# Altium PCB slave.PcbDoc
Units mil, origin at the board's own origin, x right, y up, seen from the top; angles counter-clockwise.
Board outline 6000 x 4000 mil, 2 copper layers (Top Layer, Bottom Layer); 84 components, 83 nets, 378 pads, 46 vias.
Unrouted connection lines stored in the file: 1.
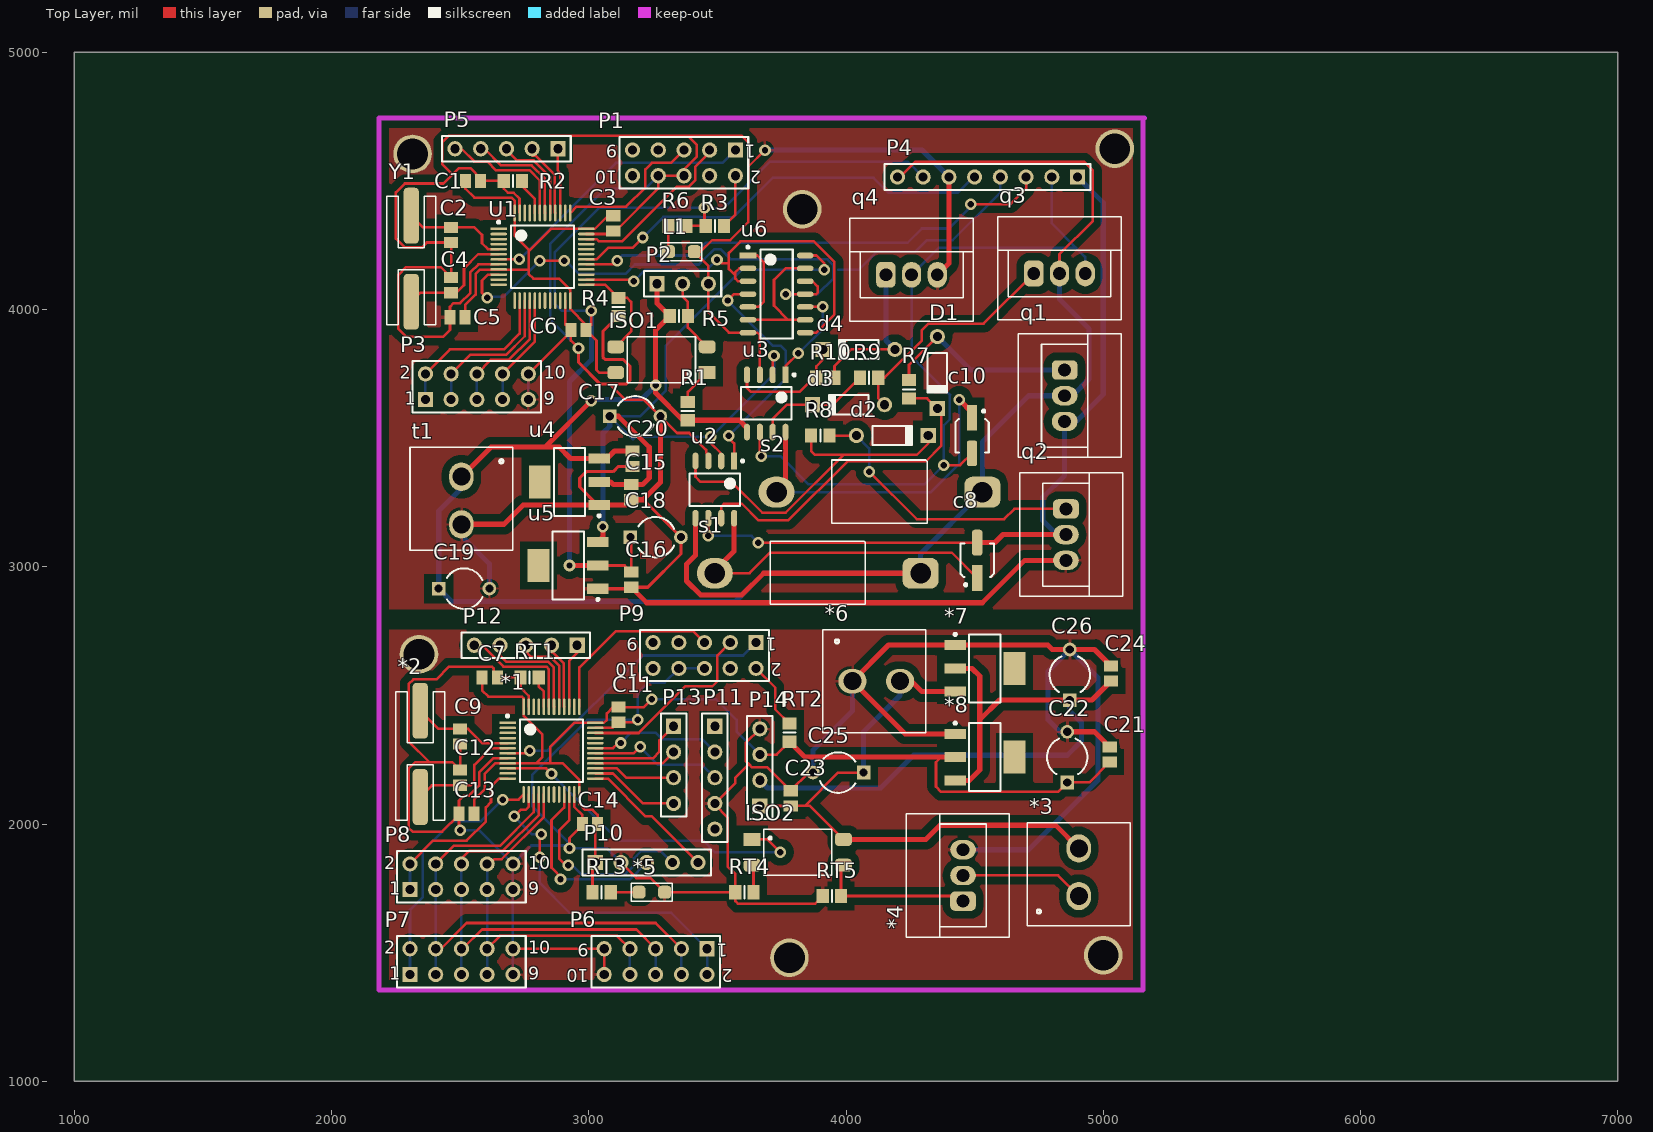
[diagram p0: Top Layer view]
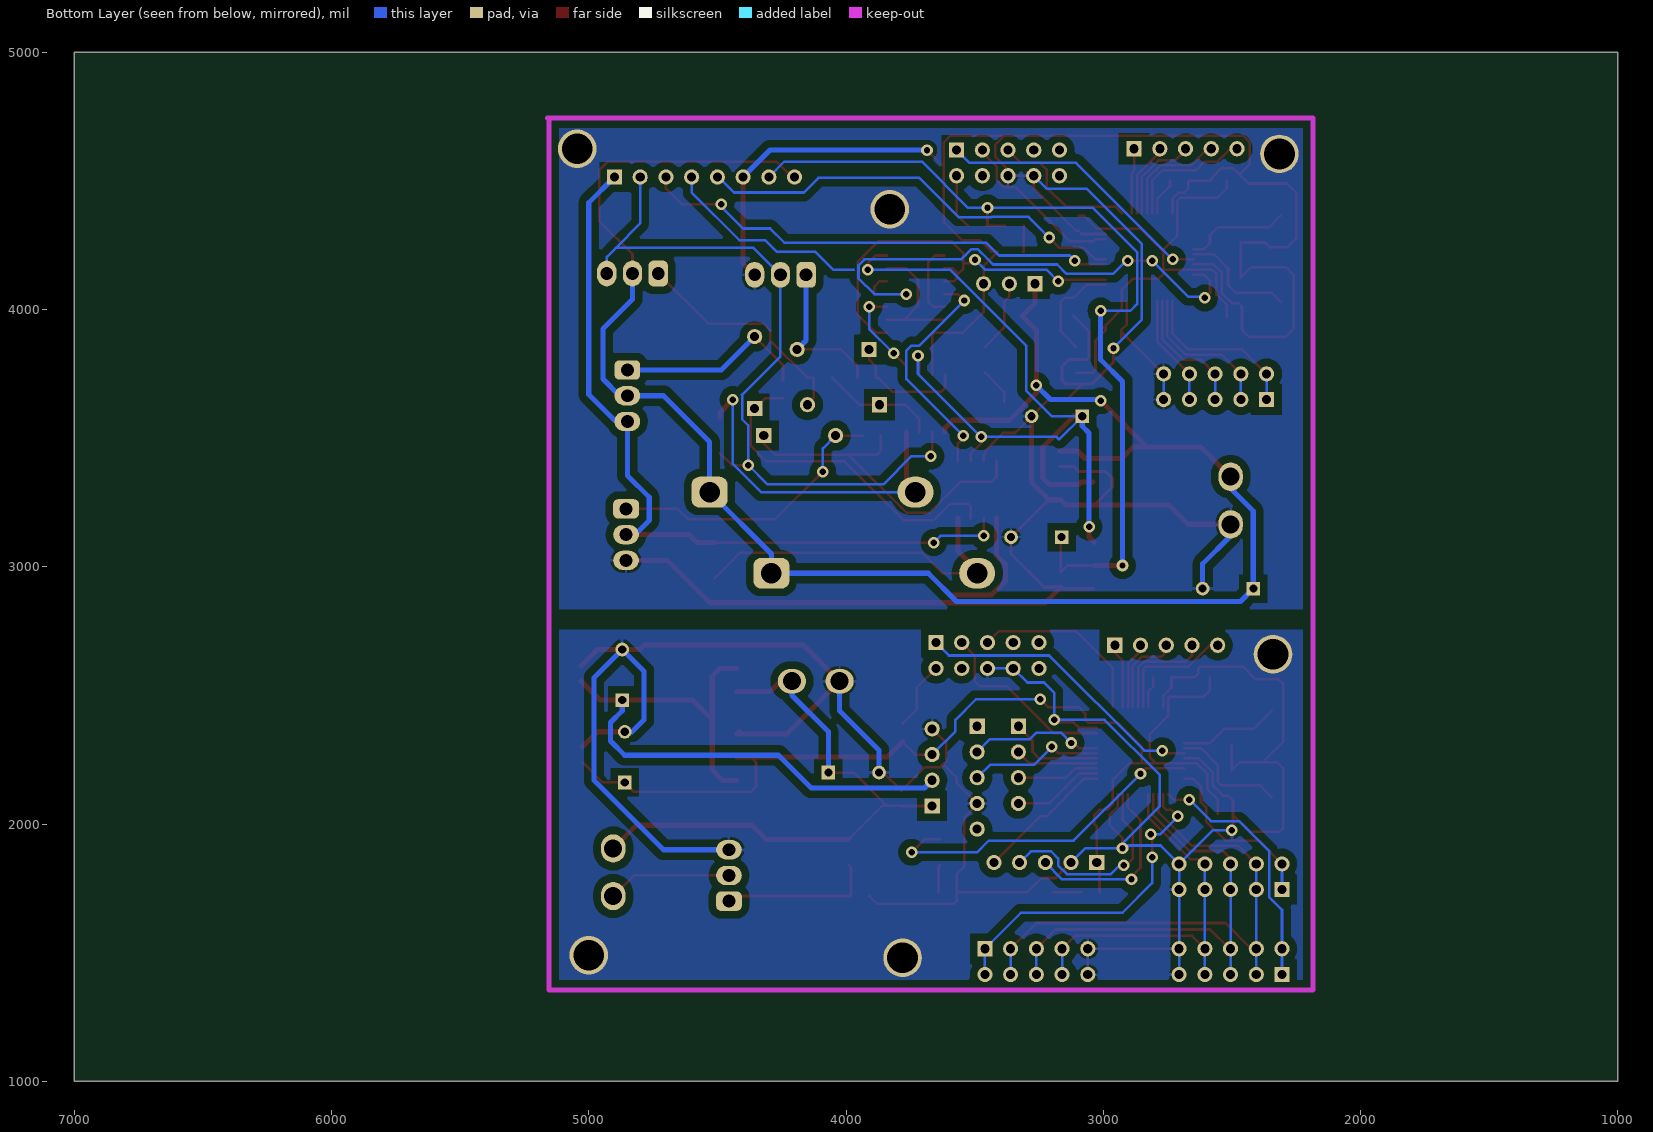
[diagram p1: Bottom Layer view, seen from below]

## Layer stack, top to bottom
Top Solder: solder mask 0.4, Solder Resist, Dk 3.5
Top Layer: signal copper 1.4
Dielectric 1: dielectric 12.6, FR-4, Dk 4.8
Bottom Layer: signal copper 1.4
Bottom Solder: solder mask 0.4, Solder Resist, Dk 3.5

## Board outline
1000,1000 7000,1000 7000,5000 1000,5000

## Design rules (kind name [scope] priority, off if disabled: settings)
Clearance "PolyGon Pour Clearance" [InPolyGon] p1: gap=30
Clearance [All] p2: gap=9
Height [All] p1 off: minheight=0 maxheight=1000 prefheight=500
PolygonConnect [All] p1: connectstyle=Relief reliefconductorwidth=10 reliefentries=4 polygonreliefangle="90 Angle" airgapwidth=10
RoutingVias [All] p1: holewidth=20 width=40 viastyle="Through Hole" minholewidth=20 minwidth=40 maxholewidth=25 maxwidth=45
SolderMaskExpansion [All] p1: expansion=4
UnpouredPolygon [All] p1: allowunpoured=FALSE
Width [All] p1: maxlimit=25 minlimit=10 preferedwidth=12 minimp=50.000000 maximp=50.000000 favimp=50.000000
28 further rules are at their usual default settings.

## Components (designator, comment, footprint, x,y, rotation, side; value= is the part's Value field where it differs from the comment)
*1 "stm32f103c8t6" LQFP48_stm32 2855,2285 r0 top
*2 "XTAL" xtal_smd 2345,2440 r270 top
*3 "domino2" Domino_2 4905,1730 r90 top
*4 "IRF540N" TO220 4455,1800 r90 top
*5 "led_smd" led_smd 3245,1735 r0 top
*6 "domino2" Domino_2 4035,2555 r0 top
*7 "ASM1117-5" SOT223 4540,2605 r0 top
*8 "ASM1117-5" SOT223 4540,2260 r0 top
C1 "Cap Pol3" C0805 2550,4500 r0 top
C2 "Cap Pol3" C0805 2465,4290 r270 top
C3 "Cap Pol3" C0805 3095,4335 r270 top
C4 "Cap Pol3" C0805 2465,4095 r90 top
C5 "Cap Pol3" C0805 2490,3970 r180 top
C6 "Cap Pol3" C0805 2960,3920 r180 top
C7 "Cap Pol3" C0805 2615,2570 r0 top
c8 "CAP_ALU_A" cap_alu_a 4510,3025 r90 top
C9 "Cap Pol3" C0805 2500,2340 r270 top
c10 "CAP_ALU_A" cap_alu_a 4490,3510 r270 top
C11 "Cap Pol3" C0805 3115,2425 r270 top
C12 "Cap Pol3" C0805 2500,2180 r90 top
C13 "Cap Pol3" C0805 2525,2040 r180 top
C14 "Cap Pol3" C0805 3005,2000 r180 top
C15 "Cap Pol3" C0805 3165,3290 r270 top
C16 "Cap Pol3" C0805 3165,2950 r270 top
C17 "Cap2" CAPR5-4X5 3180,3585 r0 top
C18 "Cap2" CAPR5-4X5 3260,3115 r0 top
C19 "Cap2" CAPR5-4X5 2515,2915 r0 top
C20 "Cap Pol3" C0805 3170,3420 r270 top
C21 "Cap Pol3" C0805 5025,2270 r90 top
C22 "Cap2" CAPR5-4X5 4860,2260 r90 top
C23 "Cap Pol3" C0805 3785,2100 r90 top
C24 "Cap Pol3" C0805 5030,2585 r90 top
C25 "Cap2" CAPR5-4X5 3970,2200 r180 top
C26 "Cap2" CAPR5-4X5 4870,2580 r90 top
D1 "Diode 1N4148" DO-35 4355,3755 r270 top
d2 "Diode 1N4148" DO-35 4180,3510 r0 top
d3 "Diode 1N4148" DO-35 4010,3630 r180 top
d4 "Diode 1N4148" DO-35 4050,3845 r180 top
ISO1 "opto" opto_smd 3460,3755 r180 top
ISO2 "opto" opto_smd 3635,1940 r0 top
L1 "led_smd" led_smd 3360,4225 r0 top
P1 "Header 5X2" HDR2X5 3570,4620 r180 top
P2 "Header 3" HDR1X3 3265,4100 r0 top
P3 "Header 5X2" HDR2X5 2365,3650 r0 top
P4 "Header 8" HDR1X8 4900,4515 r180 top
P5 "Header 5" HDR1X5 2880,4625 r180 top
P6 "Header 5X2" HDR2X5 3460,1515 r180 top
P7 "Header 5X2" HDR2X5 2305,1415 r0 top
P8 "Header 5X2" HDR2X5 2305,1745 r0 top
P9 "Header 5X2" HDR2X5 3650,2705 r180 top
P10 "Header 5" HDR1X5 3025,1850 r0 top
P11 "Header 5" HDR1X5 3490,2380 r270 top
P12 "Header 5" HDR1X5 2955,2695 r180 top
P13 "Header 4" HDR1X4 3330,2380 r270 top
P14 "Header 4" HDR1X4 3665,2070 r90 top
q1 "IRF540N" TO220 4850,3665 r270 top
q2 "IRF540N" TO220 4855,3125 r270 top
q3 "IRF540N" TO220 4830,4140 r0 top
q4 "IRF540N" TO220 4255,4135 r0 top
R1 "" 6-0805_N 3385,3605 r90 top
R2 "" 6-0805_N 2705,4500 r180 top
R3 "" 6-0805_N 3490,4325 r0 top
R4 "" 6-0805_N 3115,4010 r90 top
R5 "" 6-0805_N 3350,3975 r180 top
R6 "" 6-0805_N 3345,4325 r0 top
R7 "" 6-0805_N 4245,3690 r270 top
R8 "" 6-0805_N 3900,3510 r180 top
R9 "" 6-0805_N 4090,3735 r180 top
R10 "" 6-0805_N 3920,3735 r180 top
RT1 "Res Thermal" 6-0805_N 2770,2570 r0 top
RT2 "Res Thermal" 6-0805_N 3780,2355 r270 top
RT3 "Res Thermal" 6-0805_N 3050,1735 r180 top
RT4 "Res Thermal" 6-0805_N 3605,1735 r180 top
RT5 "Res Thermal" 6-0805_N 3945,1720 r180 top
s1 "IN5822" "schottky diode" 3890,2975 r180 top
s2 "IN5822" "schottky diode" 4130,3290 r180 top
t1 "domino2" Domino_2 2505,3340 r270 top
U1 "stm32f103c8t6" LQFP48_stm32 2820,4205 r0 top
u2 "ir2184" SOP8_ir2184 3490,3300 r270 top
u3 "ir2184" SOP8_ir2184 3690,3635 r270 top
u4 "ASM1117-5" SOT223 2925,3330 r180 top
u5 "ASM1117-3.3" SOT223 2920,3005 r180 top
u6 "74HC02D" "SOP14_Nor gate" 3730,4060 r0 top
Y1 "XTAL" xtal_smd 2310,4365 r270 top

## Footprints (in the part's own frame and the unit in brackets; to place one, negate y for a bottom-side part, rotate by r counter-clockwise, add the part's x,y. Pads: shape width x height; smd on the part's side, far side on the other; paste and mask are expansions set on the pad)
6-0805_N [mm] "Chip Resistor, Body 2.0x1.2mm, IPC Medium Density"
  rect 1.2x1.4 smd: 1(-0.9,0) 2(0.9,0)
  silkscreen extent 0,-0.6 0,0.6, body extent -1.07,-0.7 1.07,0.7, height 0.7
C0805 [mm] "Chip Capacitor, Body 2.0x1.3mm, IPC High Density"
  rect 1.1x1.4 smd: 1(-0.75,0) 2(0.75,0)
  body extent -1.1,-0.72 1.1,0.72, height 1.4
cap_alu_a [mil] "Aluminum Electrolytic Capacitor, Body 3.30x3.30x29.00mm, IPC Low Density"
  rect 100x40 smd: 1(-68.9,0)
  rrect50% 100x40 smd: 2(68.9,0)
  silkscreen extent -100,-65 65,65, body extent -65,-65 65,65, height 1142
CAPR5-4X5 [mm] "Capacitor; 2 Leads"
  rect 1.35x1.35 hole 0.8: 1(-2.5,0)
  round 1.35 hole 0.8: 2(2.5,0)
  silkscreen extent -1.69,-2 1.82,2
DO-35 [mm] "Diode, Axial; Body 3.8 x 1.9 mm (LxDia. max), Lead Dia. 0.53 mm (max)"
  round 1.5 hole 0.9: 1(-3.55,0)
  rect 1.5x1.5 hole 0.9: 2(3.55,0)
  silkscreen extent -1.95,-0.95 2.05,0.95
Domino_2 [mil]
  oval 110x95 hole 70: 1(-10,0) 2(175,0)
  silkscreen extent -125,-200 275,200
HDR1X3 [mm] "Connector; Header; 3 Position"
  rect 1.5x1.5 hole 0.9: 1(0,0)
  round 1.5 hole 0.9: 2(2.54,0) 3(5.08,0)
  silkscreen extent -1.27,-1.27 6.35,1.27
HDR1X4 [mm] "Connector; Header; 4 Position"
  rect 1.5x1.5 hole 0.9: 1(0,0)
  round 1.5 hole 0.9: 2(2.54,0) 3(5.08,0) 4(7.62,0)
  silkscreen extent -1.27,-1.27 8.89,1.27
HDR1X5 [mm] "Connector; Header; 5 Position"
  rect 1.5x1.5 hole 0.9: 1(0,0)
  round 1.5 hole 0.9: 2(2.54,0) 3(5.08,0) 4(7.62,0) 5(10.16,0)
  silkscreen extent -1.27,-1.27 11.43,1.27
HDR1X8 [mm] "Connector; Header; 8 Position"
  rect 1.5x1.5 hole 0.9: 1(0,0)
  round 1.5 hole 0.9: 2(2.54,0) 3(5.08,0) 4(7.62,0) 5(10.16,0) 6(12.7,0) 7(15.24,0) 8(17.78,0)
  silkscreen extent -1.27,-1.27 19.05,1.27
HDR2X5 [mm] "Connector; Header; 5x2 Position"
  rect 1.5x1.5 hole 0.9: 1(0,0)
  round 1.5 hole 0.9: 2(0,2.54) 3(2.54,0) 4(2.54,2.54) 5(5.08,0) 6(5.08,2.54) 7(7.62,0) 8(7.62,2.54) 9(10.16,0) 10(10.16,2.54)
  silkscreen extent -1.27,-1.27 11.43,3.81
led_smd [mil]
  rrect50% 50x50 smd: 1(-50,0) 2(50,0)
  silkscreen extent -80,-35 80,35
LQFP48_stm32 [mm] "TSQFP, 48-Leads, Body 7.00x7.00mm, Pitch 0.50mm, IPC High Density"
  rect 1.65x0.25 smd: 1(-4.325,2.75)
  oval 1.65x0.25 smd: 2(-4.325,2.25) 3(-4.325,1.75) 4(-4.325,1.25) 5(-4.325,0.75) 6(-4.325,0.25) 7(-4.325,-0.25) 8(-4.325,-0.75) 9(-4.325,-1.25) 10(-4.325,-1.75) 11(-4.325,-2.25) 12(-4.325,-2.75) 25(4.325,-2.75) 26(4.325,-2.25) 27(4.325,-1.75) 28(4.325,-1.25) 29(4.325,-0.75) 30(4.325,-0.25) 31(4.325,0.25) 32(4.325,0.75) 33(4.325,1.25) 34(4.325,1.75) 35(4.325,2.25) 36(4.325,2.75)
  oval 0.25x1.65 smd: 13(-2.75,-4.325) 14(-2.25,-4.325) 15(-1.75,-4.325) 16(-1.25,-4.325) 17(-0.75,-4.325) 18(-0.25,-4.325) 19(0.25,-4.325) 20(0.75,-4.325) 21(1.25,-4.325) 22(1.75,-4.325) 23(2.25,-4.325) 24(2.75,-4.325) 37(2.75,4.325) 38(2.25,4.325) 39(1.75,4.325) 40(1.25,4.325) 41(0.75,4.325) 42(0.25,4.325) 43(-0.25,4.325) 44(-0.75,4.325) 45(-1.25,4.325) 46(-1.75,4.325) 47(-2.25,4.325) 48(-2.75,4.325)
  silkscreen extent -4.45,-3.1 3.1,3.55, body extent -3.5,-3.5 3.5,3.5, height 1.6
opto_smd [mil]
  rect 65x50 smd: 1(0,0)
  rrect50% 65x50 smd: 2(0,-100) 3(355,-100) 4(355,0)
  silkscreen extent 45,-140 310,40
"schottky diode" [mil]
  rrect50% 140x120 hole 80: 1(-400,0)
  oval 140x120 hole 80: 2(400,0)
  silkscreen extent -185,-125 185,120
SOP8_ir2184 [mm]
  rect 1.65x0.6 smd: 1(-2.825,1.905)
  oval 1.65x0.6 smd: 2(-2.825,0.635) 3(-2.825,-0.635) 4(-2.825,-1.905) 5(2.825,-1.905) 6(2.825,-0.635) 7(2.825,0.635) 8(2.825,1.905)
  silkscreen extent -2.95,-2.5 1.6,2.88, body extent -2,-2.5 2,2.5, height 1.75
"SOP14_Nor gate" [mm] "SOIC, 14-Leads, Body 8.65x3.90mm, Pitch 1.27mm, IPC High Density"
  rect 1.65x0.55 smd: 1(-2.825,3.81)
  oval 1.65x0.55 smd: 2(-2.825,2.54) 3(-2.825,1.27) 4(-2.825,0) 5(-2.825,-1.27) 6(-2.825,-2.54) 7(-2.825,-3.81) 8(2.825,-3.81) 9(2.825,-2.54) 10(2.825,-1.27) 11(2.825,0) 12(2.825,1.27) 13(2.825,2.54) 14(2.825,3.81)
  silkscreen extent -2.95,-4.4 1.6,4.76, body extent -2,-4.4 2,4.4, height 1.75
SOT223 [mm] "SOT223, 4-Leads, Body 6.50x7.00mm (avg), Pitch 2.30mm, IPC Medium Density"
  rect 2.15x1 smd: 1(-2.93,2.3) 2(-2.93,0) 3(-2.93,-2.3)
  rect 2.15x3.25 smd: 4(2.93,0)
  silkscreen extent -3.05,-3.35 1.55,3.47, body extent -1.86,-3.35 1.86,3.35, height 1.8
TO220 [mil]
  rrect50% 75x100 hole 50: 1(-100,0)
  oval 75x100 hole 50: 2(0,0) 3(100,0)
  silkscreen extent -240,-180 240,220
xtal_smd [mil]
  rrect50% 217x59 smd: 1(0,0) 2(335,0)
  silkscreen extent -75,-95 425,95

## Part data
C1 C2 C3 C4 C5 C6 C7 C9 C11 C12 C13 C14 C15 C16 C20 C21 C23 C24: "Polarized Capacitor (Surface Mount)"
C17 C18 C19 C22 C25 C26: "Capacitor"
D1 d2 d3 d4: "High Conductance Fast Diode"
P1 P3 P6 P7 P8 P9: "Header, 5-Pin, Dual row"
P2: "Header, 3-Pin"
P4: "Header, 8-Pin"
P5 P10 P11 P12: "Header, 5-Pin"
P13 P14: "Header, 4-Pin"
R1 R2 R3 R4 R5 R6 R7 R8 R9 R10: library part "Res Thermal", "Thermistor"
RT1 RT2 RT3 RT4 RT5: "Thermistor"
u5: library part ASM1117-5

## Free pads (board coordinates)
  round 150 hole 120: 0(2340,2660) 1(5000,1490) 2(3780,1480) 3(2315,4605) 4(5045,4625) 5(3830,4390)

## Via types
v1: diameter 45, hole 25, Top Layer to Bottom Layer, 46 vias

## Nets (pads, with @x,y where several pads share a name; then routed paths per layer and width w, separated by ;. In a path a pad name is that pad's centre, name@x,y a point inside that pad or via, vN(x,y) a via of type N, cw(c..) or ccw(c..) an arc to the next point about the centre after c; other vN are vias at no path point)
1PA0: *1.10 ISO2.1 | length 1326.1
  Top Layer w10: *1.10 2833.9,2216.1 v1(2855,2195) ; ISO2.1 3695,1940 v1(3745,1890)
  Bottom Layer w10: v1(2855,2195) 3115,1935 3445,1935 3490,1890 v1(3745,1890)
1PA2: *1.12 P8.1 P8.2 | length 684.5
  Top Layer w10: P8.2 2395,1935 2525,1935 2600,2010 2600,2065 2620,2085 2620,2145 2651.73,2176.73 *1.12
  Bottom Layer w10: P8.1 P8.2
1PA3: *1.13 P7.1 P7.2 | length 983.5
  Top Layer w10: v1(2665,2095) 2727.01,2095 *1.13
  Bottom Layer w10: P7.1 P7.2 2305,1666.15 2355,1716.15 2355,1895 2471.5,2011.5 2581.5,2011.5 v1(2665,2095)
1PA4: *1.14 P6.1 P6.2 | length 1301.5
  Top Layer w10: v1(2710,2030) 2735,2055 2755,2055 2766.42,2066.42 *1.14 ; v1(2810,1870) 2810,1955 v1(2815,1960)
  Bottom Layer w10: v1(2710,2030) 2780,1960 v1(2815,1960) ; v1(2810,1870) 2810,1770 2925,1655 3320,1655 P6.1 P6.2
1PA5: *1.15 P6.3 P6.4 P7.3 P7.4 P8.3 P8.4 | length 2100.9
  Top Layer w10: P7.4 2425,1515 2525,1615 3260,1615 P6.3 ; P8.4 2475,1915 2655,1915 2786.1,2046.1 *1.15
  Bottom Layer w10: P7.3 P7.4 P8.3 P8.4 ; P6.4 P6.3
1PA6: *1.16 P6.5 P6.6 P7.5 P7.6 P8.5 P8.6 | length 1817.6
  Top Layer w10: P7.6 2510,1515 2585,1590 3185,1590 P6.5 ; P8.6 2505,1865 2535,1895 2665,1895 2805.79,2035.79 *1.16
  Bottom Layer w10: P7.5 P7.6 P8.5 P8.6 ; P6.6 P6.5
1PA7: *1.17 P6.7 P6.8 P7.7 P7.8 P8.7 P8.8 | length 1510
  Top Layer w10: P7.8 2655,1565 3110,1565 P6.7 ; P8.8 2615,1845 2633.03,1863.03 2661.47,1863.03 2825.47,2027.03 *1.17
  Bottom Layer w10: P7.7 P7.8 P8.7 P8.8 ; P6.8 P6.7
1PA8: *1.29 P13.1 | length 382.1
  Top Layer w10: *1.29 3249.53,2255.47 3275,2280.95 3275,2325 P13.1
1PA9: *1.30 P11.3 | length 524.7
  Top Layer w10: *1.30 3175.16,2275.16 v1(3200,2300)
  Bottom Layer w10: v1(3200,2300) 3270,2230 3440,2230 P11.3
1PA10: *1.31 P11.2 | length 520.7
  Top Layer w10: *1.31 3094.84,2294.84 3115,2315 v1(3125,2315)
  Bottom Layer w10: v1(3125,2315) 3165,2355 3260,2355 3285,2330 3440,2330 P11.2
1PB3: *1.39 P12.1 | length 252.6
  Top Layer w10: *1.39 2923.9,2633.9 2955,2665 P12.1
1PB4: *1.40 P12.2 | length 262.1
  Top Layer w10: P12.2 2855,2668.56 2858.46,2668.56 2903.53,2623.5 2903.53,2455.96 *1.40
1PB5: *1.41 P12.3 | length 337.4
  Top Layer w10: P12.3 2755,2670 2775.44,2649.56 2850.59,2649.56 2884.53,2615.63 *1.41
1PB6: *1.42 P12.4 | length 422.4
  Top Layer w10: P12.4 2655,2655.56 2680,2630.56 2842.72,2630.56 2864.16,2609.13 2864.16,2455.28 *1.42
1PB7: *1.43 P12.5 | length 475
  Top Layer w10: P12.5 2585,2695 2668.44,2611.56 2834.85,2611.56 2845.16,2601.26 *1.43
1PB10: *1.21 P10.3 | length 740.7
  Top Layer w10: v1(2890,1785) 2900,1785 2855,1830 2855,2015 2904.21,2064.21 *1.21
  Bottom Layer w10: v1(2890,1785) 3160,1785 P10.3
1PB11: *1.22 P10.4 | length 805.9
  Top Layer w10: v1(2920,1840) 2915,1835 2885,1865 2885,1975 2923.9,2013.9 *1.22
  Bottom Layer w10: v1(2920,1840) 2935,1840 2970,1805 3141.56,1805 3175,1838.44 3175,1866.47 3202.06,1893.53 3281.47,1893.53 P10.4
1PB12: *1.25 P10.5 | length 535.1
  Top Layer w10: *1.25 3074.32,2176.73 3221.05,2030 3245,2030 P10.5
1PB13: *1.26 P13.4 | length 352.9
  Top Layer w10: *1.26 3093.58,2196.42 3210,2080 P13.4
1PB14: *1.27 P13.3 | length 319.7
  Top Layer w10: *1.27 3108.9,2216.1 3145,2180 P13.3
1PB15: *1.28 P13.2 | length 323
  Top Layer w10: *1.28 3285.79,2235.79 P13.2
3V: C1.1 C3.1 C5.1 C6.1 C16.1 C18.1 ISO1.4 P4.7 R3.1 R6.2 U1.9 U1.24 U1.36 U1.48 u5.2 | length 5549.1
  Top Layer w10: C5.1 2519.53,4017.66 2560,4058.13 2560,4138.13 2576.89,4155.02 2766.5,4155.02 ; C1.1 2520.47,4469.53 2555,4435 2700,4435 2711.73,4423.27 U1.48 2711.73,4288.27 2770,4230 ; v1(3010,3995) 3010,3940.47 C6.1 ; u5.2 3139.53,3005 C16.1 3165,3111.57 C18.1 ; C3.1 3074.53,4364.53 3023.27,4313.27 U1.36 2853.27,4313.27 2770,4230 ; ISO1.4 3040,3755 3030,3765 3030,3879.53 C6.1 ; R6.2 R3.1 3450,4329.57 v1(3450,4395) ; 2770,4230 2766.5,4226.5 2766.5,4138.5 2785,4120 2884.58,4120 2928.27,4076.31 U1.24 2928.27,4001.73 2989.53,3940.47 C6.1
  Top Layer w20: v1(2925,3005) u5.2
  Bottom Layer w10: v1(3010,3995) 2895,3995 2868.5,4021.5 2868.5,4223.5 3040,4395 v1(3450,4395) 3525,4395 3705,4575 4240,4575 P4.7
  Bottom Layer w20: v1(2925,3005) 2925,3720 3010,3805 v1(3010,3995)
5V: C15.1 C17.1 P4.4 u2.2 u3.2 u4.2 u5.3 u6.14 | length 4175.8
  Top Layer w10: v1(3475,3505) 3475,3480 3515,3440 u2.2 ; u3.2 3715,3815 v1(3720,3820) ; u6.14 3885,4210 3915,4180 v1(3915,4155)
  Top Layer w20: u5.3 3055,3115.2 v1(3055,3155) ; u4.2 3085,3330 3095.47,3319.53 C15.1 3209.53,3319.53 3235,3345 3235,3465 3115,3585 C17.1
  Bottom Layer w10: v1(3720,3820) 3720,3750 v1(3475,3505) 3181.57,3505 3171.57,3495 C17.1 3200,3585 3300,3685 3300,3860 3595,4155 v1(3915,4155) ; 3970.5,4155 4050,4155 4120,4225 4270,4225 4315,4270 4415,4270 4600,4455 P4.4
  Bottom Layer w20: v1(3055,3155) 3055,3520 3081.57,3546.57 C17.1
5V1: *7.2 *8.3 C24.1 C26.1 P14.2 | length 2673.1
  Top Layer w20: *8.3 4479.45,2169.45 4520,2210 4520,2405 ; *7.2 4490,2605 4520,2575 4520,2405 ; C24.1 4956.1,2481.57 C26.1 4596.57,2481.57 4520,2405
  Bottom Layer w20: P14.2 3695,2140 4135,2140 4262.28,2267.28 4860,2267.28 4915,2322.28 4915,2395 4870,2440 C26.1
12V: C19.1 C20.1 P2.1 P4.8 q1.2 q3.2 R1.1 R5.2 s1.1 s2.1 t1.1 u2.5 u3.5 u4.3 | length 8645.6
  Top Layer w10: P4.8 4210,4515 4270,4575 4925,4575 4960,4540 4960,4345 4830,4215 q3.2
  Top Layer w20: t1.1 2620,3465 2830,3465 ; v1(3010,3645) 2830,3465 ; C20.1 3099.53,3449.53 3070.55,3420.55 u4.3 2929.45,3420.55 2885,3465 2830,3465 ; P2.1 3265,4024.57 R5.2 3260,3920.43 v1(3260,3705) 3260,3675 3365.43,3569.57 R1.1 3585,3569.57 3585,3570 3615,3540 u3.5 ; u2.5 3415,3045 3380,3010 3380,2945 3435,2890 3595,2890 3680,2975 s1.1
  Bottom Layer w20: t1.1 2505,3305 2416.57,3216.57 C19.1 2466.57,2865 3570,2865 3680,2975 s1.1 4290,3050 s2.1 4530,3485 4710,3665 q1.2 4880,3665 4945,3730 4945,3925 4830,4040 q3.2 ; v1(3010,3645) 3010,3650 3205,3650 v1(3260,3705)
12V1: *3.2 *6.2 *7.3 C23.1 C25.1 ISO2.4 P14.1 | length 2280.8
  Top Layer w10: P14.1 C23.1@3784.53,2070 ; C23.1 3840,2070.47 ; ISO2.4 3859.53,2070.47 3840,2070.47 ; C25.1 3969.53,2200 3840,2070.47
  Top Layer w20: ISO2.4 4310,1940 4365,1995 4815,1995 *3.2 ; *6.2 4255,2555 4295.55,2514.45 *7.3
  Bottom Layer w20: C25.1 4068.43,2358.43 4210,2500 *6.2
DIR: U1.26 u6.2 u6.3 u6.8 | length 1637.9
  Top Layer w10: U1.26 3168.58,4116.42 v1(3175,4110) ; v1(3498.5,4193.5) 3501.5,4193.5 3515,4180 3545,4180 ; u6.3 3580,4110 3570,4120 3570,4132.5 ; u6.2 3585,4160 3570,4145 3570,4132.5 ; u6.8 3885,3910 3955,3980 3955,4185 3875,4265 3590,4265 3545,4220 3545,4180 ; 3545,4180 3545,4157.5 3570,4132.5
  Bottom Layer w10: v1(3175,4110) 3220,4155 3460,4155 v1(3498.5,4193.5)
GND: C1.2 C2.2 C3.2 C4.2 C5.2 C6.2 C15.2 C16.2 C17.2 C18.2 C19.2 C20.2 L1.2 P1.6 P1.8 P2.3 P3.9 P3.10 P4.6 pad.3 pad.4 pad.5 q2.3 q4.3 R2.2 R4.1 t1.2 U1.8 U1.23 U1.35 U1.47 u2.3 u3.3 u4.1 u5.1 u6.7 | length 13668.8
  Top Layer w10: U1.8 2570.47,4175.47 2540,4145 2540,4065 2500,4025 2475,4025 2460.47,4010.47 C5.2 2460.47,3920.47 2435,3895 2290,3895 2260,3925 2260,4135 2290,4165 2424.53,4165 C4.2 C2.2 2370.47,4260.47 2350,4240 2347.5,4242.5 2283.34,4242.5 2250,4275.84 2250,4455 2285,4490 2435,4490 2470,4525 ; U1.47 2730.73,4375.96 2730.73,4431.14 2707.87,4454 2686,4454 2669.57,4470.43 R2.2 C1.2 2579.53,4509.96 2539.48,4550 2495,4550 2470,4525 ; P3.10@2765,3754.53 P3.10 C6.2@2930.47,3915.47 ; U1.23 2908.58,3941.89 C6.2 C6.2@2930.47,3915.47 ; v1(2960,3850) 2930.47,3879.53 C6.2@2930.47,3915.47 ; U1.35 3083.11,4293.58 C3.2 3104.96,4305.47 3270,4470.52 P1.8 P1.6 3370,4545 3420,4595 3420,4640 3385,4675 ; 3080,3710 3140,3650 3213.43,3650 C17.2 3343.43,3520 3390,3520 3456,3454 3456,3443.35 3465,3434.35 u2.3 ; u3.3 3665,3900 3655,3910 u6.7 3545,3910 3465,3990 P2.3 3465,4170 L1.2 3435,4225 3480,4270 3550,4270 3620,4340 3620,4555 ; v1(3685,4620) 3620,4555 ; 2470,4525 2430,4565 2430,4650 2455,4675 3385,4675 ; 3385,4675 3595,4675 3620,4650 3620,4555
  Top Layer w12: v1(2960,3850) 2960,3795 3045,3710 3080,3710 3145,3710 3160,3725 3160,3780 3135,3805 3065,3805 3055,3815 3055,3914.57 R4.1 ; u5.1 3158.98,2914.45 C16.2 3229.53,2920.47 3358.43,3049.37 C18.2 3212.95,3260.47 ; u4.1 3035.55,3239.45 2965,3310 2965,3345 2990,3370 3095,3370 3115.47,3390.47 C20.2
  Top Layer w20: t1.2 2670,3165 2744.45,3239.45 u4.1@3035.55,3239.45 ; u4.1 3143.98,3239.45 C15.2 3210.47,3260.47 3278.43,3328.43 C17.2 ; C16.2 3225.47,2860 4530,2860 4695,3025 q2.3 ; q4.3 4400,4180 P4.6
  Bottom Layer w10: P3.9 P3.10 ; v1(2960,3850) 2849.5,3960.5 2849.5,4254.5 3065,4470 3220,4470 P1.8
  Bottom Layer w20: t1.2 2505,3120 2613.43,3011.57 C19.2 ; v1(3685,4620) 4295,4620 P4.6
GND1: *1.8 *1.23 *1.35 *1.47 *4.3 *5.2 *6.1 *7.1 *8.1 C7.2 C9.2 C11.2 C12.2 C13.2 C14.2 C21.2 C22.2 C23.2 C24.2 C25.2 C26.2 P6.9 P6.10 P7.9 P7.10 P8.9 P8.10 P9.6 P9.8 P10.2 P11.4 P14.4 pad.0 pad.1 pad.2 RT1.1 RT4.2 RT5.2 | length 11182
  Top Layer w10: v1(2500,1975) 2495.47,1979.53 C13.2@2495.47,2035.47 ; C9.2 C12.2 2469.53,2240 2380,2240 ; *1.8 2684.04,2254.79 2627.92,2254.79 2574,2200.87 2574,2149 2535,2110 2515,2110 2495.47,2090.47 C13.2 C13.2@2495.47,2035.47 ; P7.10 P6.9 P6.10 ; *1.47 2766.42,2498.58 2734.57,2530.43 RT1.1 C7.2 2630,2584.53 2630,2605 2623.44,2611.56 2456.56,2611.56 2407.5,2562.5 2318.34,2562.5 2300,2544.16 2300,2320 2380,2240 ; v1(2925,1905) 2925,1945 2975.47,1995.47 C14.2 2975.47,2034.53 2943.58,2066.42 *1.23 ; *1.35 3093.11,2373.58 C11.2 3180.47,2395.47 v1(3190,2405) ; P10.2 3185,1790 3240,1790 *5.2 RT4.2 ; P14.4 3610,2315 3610,2245 3622.5,2232.5 ; C25.2 3855.47,2200 C23.2 3694.53,2220 3635,2220 3622.5,2232.5 ; RT5.2 3879.57,1690 3580,1690 3569.57,1700.43 RT4.2 ; 2380,2240 2325,2240 2300,2215 2300,1985 2315,1970 2430,1970 C13.2@2495.47,2035.47 ; RT4.2 3569.57,1805.43 3540,1835 3540,2025 3490,2075 P11.4 3570,2160 3570,2180 3622.5,2232.5
  Top Layer w20: *8.1@4415.2,2360 *8.1 4424.09,2350 4230,2350 *6.1 4165.55,2695.55 *7.1 4784.45,2695.55 4801.57,2678.43 C26.2 4966.1,2678.43 C24.2 ; C22.2 4966.1,2358.43 C21.2
  Bottom Layer w10: v1(2500,1975) 2575,1975 P8.10 ; P7.9 P7.10 P8.9 P8.10 ; v1@2935,1915 2780,2070 2780,2190 2995,2405 v1(3190,2405) 3190,2510 3230,2550 3295,2550 P9.8 P9.6 ; P10.2 3070,1905 v1(2925,1905) 2913.5,1916.5 2776.5,1916.5 P8.10
  Bottom Layer w20: C25.2 3871.57,2286.57 4025,2440 *6.1 ; *4.3 4710,1900 4980,2170 4980,2568.43 C26.2 4785,2593.43 4785,2405 4831.57,2358.43 C22.2
IN1: u2.1 u6.4 | length 923.1
  Top Layer w10: v1(3540,4035) 3565,4060 u6.4 ; v1(3545,3510) 3545,3500 3565,3480 u2.1
  Bottom Layer w10: v1(3540,4035) 3715,3860 3745,3860 3765,3840 3765,3730 v1(3545,3510)
IN2: u3.1 u6.10 | length 392.6
  Top Layer w10: u3.1 3765,3780 v1(3815,3830) ; u6.10 v1(3910,4010)
  Bottom Layer w10: v1(3815,3830) 3910,3925 v1(3910,4010)
M+: c8.2 P4.1 q1.3 q2.2 u2.6 | length 3099.5
  Top Layer w10: v1(3465,3120) u2.6 ; v1(3658.9,3093.9) c8.2
  Top Layer w20: c8.2 4578.9,3093.9 4610,3125 q2.2
  Bottom Layer w10: v1(3465,3120) 3632.8,3120 v1(3658.9,3093.9)
  Bottom Layer w20: q2.2 4850,3120 4825,3120 4765,3180 4765,3270 4850,3355 q1.3 4895,3565 5000,3670 5000,4415 P4.1
M-: c10.2 P4.2 q3.3 q4.2 u3.6 | length 2936.4
  Top Layer w10: u3.6 3665,3435 v1(3670,3430) ; v1(4380,3395) 4443.9,3395 c10.2
  Bottom Layer w10: v1(3670,3430) 3745,3430 3855,3320 4305,3320 v1(4380,3395) 4380,3550 4403.5,3573.5 4403.5,3666.62 4405,3668.12 4255,3818.12 q4.2 4360,4240 4895,4240 ; P4.2 4800,4335 4895,4240 ; q3.3 4930,4205 4895,4240
Net*1_5: *1.5 *2.1 C9.1 | length 391.7
  Top Layer w10: *2.1 2415.47,2369.53 C9.1 2530.47,2369.53 2585.47,2314.53 *1.5
Net*1_6: *1.6 *2.2 C12.1 | length 456.4
  Top Layer w10: *2.2 2390.47,2150.47 C12.1 2540.47,2150.47 2555,2165 2555,2230 2619.84,2294.84 *1.6
Net*1_44: *1.44 RT1.2 | length 123
  Top Layer w10: RT1.2 2805.43,2534.57 2825.47,2514.53 *1.44
Net*3_1: *3.1 *4.2 | length 483.1
  Top Layer w10: *4.2 4825,1800 *3.1
Net*4_1: *4.1 ISO2.3 RT5.1 | length 606.8
  Top Layer w10: ISO2.3 3980.43,1830.43 RT5.1 4435,1720 *4.1
Net*5_1: *5.1 RT3.1 | length 109.6
  Top Layer w10: RT3.1 *5.1
NetC2_1: C2.1 U1.5 Y1.1 | length 412.7
  Top Layer w10: Y1.1 2355.47,4319.53 C2.1 2555.47,4319.53 2585,4290 2585,4257.66 2608.13,4234.53 U1.5
NetC4_1: C4.1 U1.6 Y1.2 | length 454.4
  Top Layer w10: Y1.2 2345.47,4065.47 C4.1 2485.47,4065.47 2515,4095 2515,4160 2569.84,4214.84 U1.6
Netc8_1: c8.1 s1.2 u2.8 | length 1338.9
  Top Layer w10: s1.2 3625,2975 3705,3055 4411.1,3055 c8.1
  Top Layer w20: s1.2 3490,2985 3565,3060 u2.8
Netc10_1: c10.1 s2.2 u3.8 | length 1345.7
  Top Layer w20: s2.2 3765,3325 u3.8 ; v1(4440,3650) 4490,3600 c10.1
  Bottom Layer w10: s2.2 4330,3290 4440,3400 v1(4440,3650)
NetD1_1: D1.1 q1.1 R7.1 | length 763.6
  Top Layer w10: R7.1 4245,3784.76 D1.1
  Bottom Layer w20: D1.1 4484.76,3765 q1.1
NetD1_2: D1.2 R7.2 u2.7 | length 1338.9
  Top Layer w10: u2.7 3515,3235 3525,3245 3595,3245 3660,3180 3775,3180 4005,3410 4310,3410 4370,3470 4370,3615.24 D1.2 4315.67,3654.57 R7.2
Netd2_1: d2.1 q2.1 R8.1 | length 1123.6
  Top Layer w10: R8.1 d2.1 ; v1(4090,3370) 4275,3185 4615,3185 4655,3225 q2.1
  Bottom Layer w10: d2.1 4090,3460.24 v1(4090,3370)
Netd2_2: d2.2 R8.2 u2.4 | length 1357.3
  Top Layer w10: u2.4 3415,3350 3435,3330 3555,3330 3675,3210 3765,3210 3990,3435 ; R8.2 3864.57,3450.43 3880,3435 3990,3435 ; d2.2 4319.76,3479.76 4275,3435 3990,3435
Netd3_1: d3.1 q3.1 R9.1 | length 910.8
  Top Layer w10: d3.1 4125.43,3654.33 R9.1 4150,3735 4295,3880 4295,3920 4320,3945 4535,3945 q3.1
Netd3_2: d3.2 R9.2 u3.7 | length 457.1
  Top Layer w10: u3.7 3715,3575 3770,3630 d3.2 3949.57,3630 R9.2
Netd4_1: d4.1 q4.1 R10.1 | length 610.9
  Top Layer w10: R10.1 3955.43,3780.43 4020,3845 d4.1
  Bottom Layer w20: q4.1 4155,3879.76 d4.1
Netd4_2: d4.2 R10.2 u3.4 | length 470.4
  Top Layer w10: u3.4 3615,3695 3630,3680 3820,3680 3875,3735 R10.2 3884.57,3779.57 3910.24,3805.24 d4.2
NetISO1_1: ISO1.1 R1.2 | length 145.6
  Top Layer w10: R1.2 3385,3680 ISO1.1
NetISO1_2: ISO1.2 P2.2 R5.1 | length 284.4
  Top Layer w10: P2.2 3365,4050 3385.43,4029.57 R5.1 3385.43,3929.57 ISO1.2
NetISO2_2: ISO2.2 RT4.1 | length 107.3
  Top Layer w10: ISO2.2 3640.43,1834.57 RT4.1
NetL1_1: L1.1 R6.1 | length 100.2
  Top Layer w10: R6.1 3309.57,4225.43 L1.1
NetP1_2: P1.2 R3.2 | length 213.5
  Top Layer w10: R3.2 3570,4369.57 P1.2
NetP9_2: P9.2 RT2.1 | length 268.4
  Top Layer w10: P9.2 3725,2530 3725,2445.43 RT2.1
NetR2_1: R2.1 U1.44 | length 145.5
  Top Layer w10: R2.1 2740.43,4479.57 2790.47,4429.53 U1.44
Netu6_1: u6.1 u6.5 | length 296.1
  Top Layer w10: u6.5 3660,4010 3680,4030 3680,4185 3655,4210 u6.1
NRST: P1.1 U1.7 | length 1096.4
  Top Layer w10: U1.7 2729.84,4195.16 v1(2730,4195)
  Bottom Layer w10: v1(2730,4195) 3105,4570 3520,4570 P1.1
NRST1: *1.7 P9.1 | length 1143.3
  Top Layer w10: *1.7 2760.16,2275.16 v1(2770,2285)
  Bottom Layer w10: v1(2770,2285) 2840,2285 3210,2655 3600,2655 P9.1
PA0: U1.10 u6.11 u6.12 | length 2134.5
  Top Layer w10: v1(2605,4045) 2585,4065 2585,4112.97 2607.37,4135.34 2649.04,4135.34 U1.10@2649.72,4136.02 ; v1(2810,4190) v1(2905,4190) ; v1(3765,4060) u6.11 3885,4060 3890,4065 3890,4090 3870,4110 u6.12
  Bottom Layer w10: v1(2605,4045) 2600,4050 2670,4050 v1(2810,4190) ; v1(2905,4190) 2905,4195 2961.39,4138.61 3142.38,4138.61 3178.77,4175 3428.38,4175 3450.76,4197.37 3488.38,4235 3511.62,4235 3535,4211.62 3550.81,4195.81 3550,4195 3928.12,4195 3951.5,4171.62 3951.5,4121.5 3890,4060 v1(3765,4060)
PA4: P3.1 P3.2 U1.14 | length 659.5
  Top Layer w10: P3.2 2460,3845 2670,3845 2731.42,3906.42 U1.14
  Bottom Layer w10: P3.1 P3.2
PA5: P3.3 P3.4 U1.15 | length 585.2
  Top Layer w10: P3.4 2539,3824 2679,3824 2751.1,3896.1 U1.15
  Bottom Layer w10: P3.3 P3.4
PA6: P3.5 P3.6 U1.16 | length 511
  Top Layer w10: P3.6 2620,3805 2690,3805 2770.79,3885.79 U1.16
  Bottom Layer w10: P3.5 P3.6
PA7: P3.7 P3.8 U1.17 | length 436.7
  Top Layer w10: P3.8 2790.47,3875.47 U1.17
  Bottom Layer w10: P3.7 P3.8
PA8: P4.3 U1.29 | length 1886.7
  Top Layer w10: U1.29 3095.47,4175.47 v1(3110,4190) ; v1(4485,4410) 4640,4410 4700,4470 P4.3
  Bottom Layer w10: v1(3110,4190) 3130,4210 3405,4210 3455,4260 4240,4260 4295,4315 4400,4315 4490,4405 v1(4485,4410)
PA9: P4.5 U1.30 | length 1690.7
  Top Layer w10: U1.30 3030.16,4195.16 3075,4240 3170,4240 v1(3210,4280)
  Bottom Layer w10: v1(3210,4280) 3290,4360 3433.38,4360 3434.88,4358.5 3561.5,4358.5 3715,4512 4107,4512 4164,4455 4435,4455 4495,4515 P4.5
PA10: U1.31
PA11: U1.32
PA12: U1.33
PB3: P5.1 U1.39 | length 253.4
  Top Layer w10: P5.1 2880,4538.89 2888.9,4530 U1.39
PB4: P5.2 U1.40 | length 294.6
  Top Layer w10: P5.2 2780,4598.56 2793.46,4598.56 2868.53,4523.5 2868.53,4375.96 U1.40
PB5: P5.3 U1.41 | length 353.1
  Top Layer w10: P5.3@2680,4620 2720.44,4579.56 2785.59,4579.56 2849.53,4515.63 U1.41
PB6: P5.4 U1.42 | length 431.7
  Top Layer w10: P5.4 2595,4625 2659.44,4560.56 2777.72,4560.56 2829.16,4509.13 2829.16,4375.28 U1.42
PB7: P5.5 U1.43 | length 507.9
  Top Layer w10: P5.5 2505,4625 2555,4575 2605.59,4575 2639.59,4541 2640.15,4541.56 2711.01,4541.56 2769.85,4541.56 2809.47,4501.94 2809.47,4375.96 U1.43
PB12: ISO1.3 R4.2 U1.25 | length 402.2
  Top Layer w10: U1.25 3063.7,4096.73 R4.2 3149.57,4045.43 3165,4030 3165,3915 ISO1.3
PWMN: u6.6 u6.9 u6.13 | length 535.1
  Top Layer w10: u6.6 3775,3960 3720,4015 3720,4115 3765,4160 u6.13 ; 3780,3960 u6.9
SWC: P1.5 U1.37 | length 584.1
  Top Layer w10: U1.37 2953.17,4400.18 3145.18,4400.18 3220,4475 3220,4545 3245,4570 3320,4570 P1.5
SWC1: *1.37 P9.5 | length 717.1
  Top Layer w10: *1.37 2963.27,2608.27 3105,2750 3405,2750 P9.5
SWD: P1.3 U1.34 | length 666.5
  Top Layer w10: U1.34 3031.1,4273.9 3040,4265 3130,4265 3341.47,4476.47 3388.03,4476.47 3413.53,4501.97 3413.53,4553.53 3470,4610 P1.3
SWD1: *1.34 P9.3 | length 728.7
  Top Layer w10: *1.34 3193.9,2353.9 3375,2535 3480,2535 3500,2555 3500,2655 P9.3
VCC1: *1.9 *1.24 *1.36 *1.48 *8.2 C7.1 C11.1 C13.1 C14.1 C21.1 C22.1 P10.1 P14.3 RT2.2 RT3.2 | length 4338.6
  Top Layer w10: C13.1 2554.53,2094.53 2595,2135 2595,2195 2635.79,2235.79 *1.9 2795,2235.79 ; C7.1 2585.47,2519.53 2610,2495 2740,2495 2746.73,2488.27 *1.48 2747.42,2454.59 2747.42,2419.96 2820,2347.38 2820,2260.79 2795,2235.79 ; RT3.2 3014.57,1839.57 P10.1 3025,1990.47 C14.1 3034.53,2035.47 3015,2055 2985,2055 2963.27,2076.73 *1.24 2963.27,2171.73 2899.21,2235.79 2850,2235.79 ; v1(3245,2485) 3214.53,2454.53 C11.1 3094.53,2454.53 3070,2430 3070,2405 3058.27,2393.27 *1.36 2943.27,2393.27 2850,2300 2850,2235.79 ; P14.3 3730.43,2270 RT2.2 ; 4370,2260 4350,2240 4350,2145 4370,2125 4823.43,2125 C22.1 4946.1,2161.57 C21.1 ; 2795,2235.79 2850,2235.79
  Top Layer w20: RT2.2 3839.57,2260 4370,2260 *8.2
  Bottom Layer w10: v1(3245,2485) 3495,2485 3575,2405 3575,2360 P14.3
pads on no net: *1.1 *1.2 *1.3 *1.4 *1.11 *1.18 *1.19 *1.20 *1.32 *1.33 *1.38 *1.45 *1.46 *7.4 *8.4 P1.4 P1.7 P1.9 P1.10 P9.4 P9.7 P9.9 P9.10 P11.1 P11.5 U1.1 U1.2 U1.3 U1.4 U1.11 U1.12 U1.13 U1.18 U1.19 U1.20 U1.21 U1.22 U1.27 U1.28 U1.38 U1.45 U1.46 u4.4 u5.4

## Polygon pours and split planes (outlines as drawn)
GND1 on Top Layer "Keep-Out Layer-No Net" (solid, pour order 4): 2185,2795 5155,2795 5155,1365 5145,1355 2185,1355
GND on Top Layer "Keep-Out Layer-No Net" (solid, pour order 2): 2195,4745 2200,4740 5155,4740 5155,2795 2185,2795
GND1 on Bottom Layer "Keep-Out Layer-No Net" (solid, pour order 6): 2185,2795 5155,2795 5155,1355 2185,1355
GND on Bottom Layer "Keep-Out Layer-No Net" (solid, pour order 4): 2185,4745 5150,4745 5155,4740 5155,2795 2185,2795

## Keep-outs
Keep-Out Layer:
  lines w20: 2185,2795 2185,4745 2450,4745 5160,4745 5155,4740 5155,2795 5155,1355 2185,1355 2185,2805

## Text inside footprints (layer, text, board x,y; h text height)
P1: Top Overlay "2" at 3670,4540 h50 r180; Top Overlay "1" at 3650,4640 h50 r180; Top Overlay "9" at 3110,4640 h50 r180; Top Overlay "10" at 3110,4540 h50 r180
P3: Top Overlay "2" at 2265,3730 h50; Top Overlay "1" at 2285,3630 h50; Top Overlay "9" at 2825,3630 h50; Top Overlay "10" at 2825,3730 h50
P6: Top Overlay "2" at 3560,1435 h50 r180; Top Overlay "1" at 3540,1535 h50 r180; Top Overlay "9" at 3000,1535 h50 r180; Top Overlay "10" at 3000,1435 h50 r180
P7: Top Overlay "2" at 2205,1495 h50; Top Overlay "1" at 2225,1395 h50; Top Overlay "9" at 2765,1395 h50; Top Overlay "10" at 2765,1495 h50
P8: Top Overlay "2" at 2205,1825 h50; Top Overlay "1" at 2225,1725 h50; Top Overlay "9" at 2765,1725 h50; Top Overlay "10" at 2765,1825 h50
P9: Top Overlay "2" at 3750,2625 h50 r180; Top Overlay "1" at 3730,2725 h50 r180; Top Overlay "9" at 3190,2725 h50 r180; Top Overlay "10" at 3190,2625 h50 r180